# Altium PCB AD637均方根值检测_print.PcbDoc
Units mil, origin at the board's own origin, x right, y up, seen from the top; angles counter-clockwise.
Board outline 6000 x 4000 mil, 2 copper layers (Top Layer, Bottom Layer); 108 components, 0 nets, 360 pads, 8 vias.
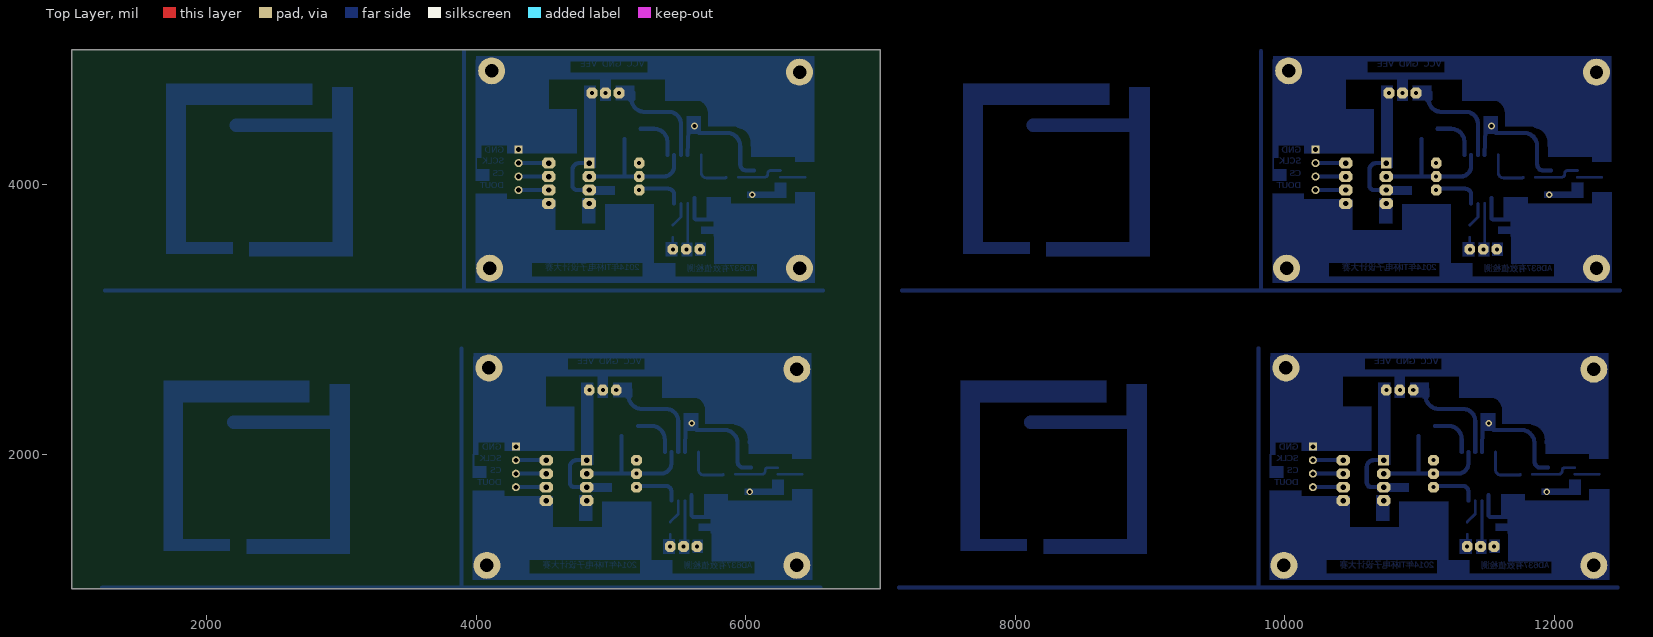
[diagram p0: Top Layer view]
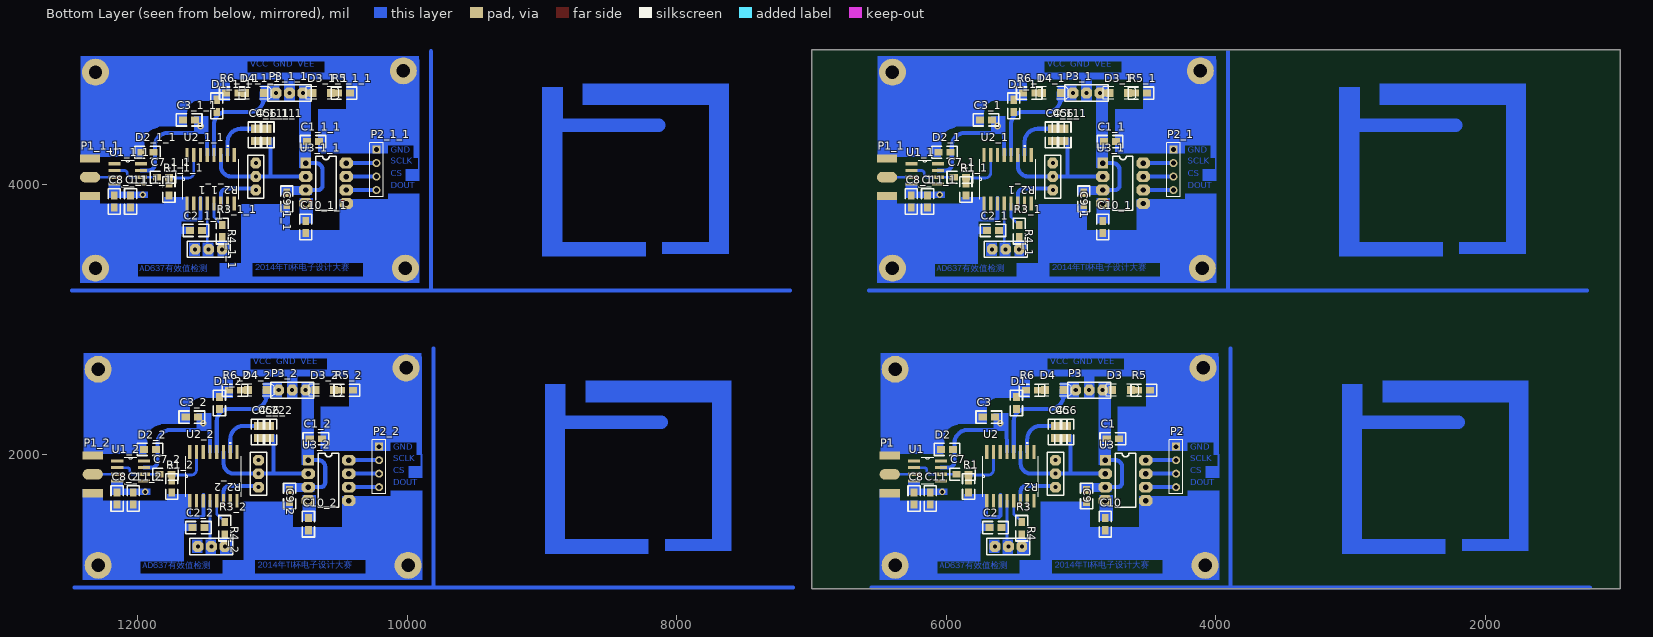
[diagram p1: Bottom Layer view, seen from below]

## Layer stack, top to bottom
Top Layer: signal copper 1.4
Dielectric: dielectric 12.6, FR-4, Dk 4.8
Bottom Layer: signal copper 1.4

## Board outline
1000,1000 7000,1000 7000,5000 1000,5000

## Design rules (kind name [scope] priority, off if disabled: settings)
Clearance [All] p1: gap=10
PolygonConnect [All] p1: connectstyle=Relief reliefconductorwidth=10 reliefentries=4 polygonreliefangle="90 Angle"
RoutingVias [All] p1: holewidth=28 width=50 viastyle="Through Hole" minholewidth=28 minwidth=50 maxholewidth=28 maxwidth=50
SilkscreenOverComponentPads [All] p1: minsilkscreentomaskgap=10
SolderMaskExpansion [All] p1: expansion=4
TestPointUsage [All] p1: valid=0 allowmultiple=FALSE
Testpoint [All] p1: side=15 testpointundercomponent=TRUE minsize=40 maxsize=100 preferedsize=60 minholesize=0 maxholesize=40 preferedholesize=32 testpointgrid=1 style=1023 order=0123456789
Width [All] p1: maxlimit=10 minlimit=10 preferedwidth=10
23 further rules are at their usual default settings.

## Components (designator, comment, footprint, x,y, rotation, side; value= is the part's Value field where it differs from the comment)
C1 "Cap" 0805 4720,2115 r0 bottom
C1_1 "Cap" 0805 4740,4320 r0 bottom (schematic designator C1)
C1_1_1 "Cap" 0805 10655,4320 r0 bottom (schematic designator C1)
C1_2 "Cap" 0805 10635,2115 r0 bottom (schematic designator C1)
C2 "Cap" 0805 5680,1455 r180 bottom
C2_1 "Cap" 0805 5700,3660 r180 bottom (schematic designator C2)
C2_1_1 "Cap" 0805 11615,3660 r180 bottom (schematic designator C2)
C2_2 "Cap" 0805 11595,1455 r180 bottom (schematic designator C2)
C3 "Cap" 0805 5640,2275 r0 bottom
C3_1 "Cap" 0805 5660,4480 r0 bottom (schematic designator C3)
C3_1_1 "Cap" 0805 11575,4480 r0 bottom (schematic designator C3)
C3_2 "Cap" 0805 11555,2275 r0 bottom (schematic designator C3)
C4 "Cap" 0805 5200,2120 r90 bottom
C4_1 "Cap" 0805 5220,4325 r90 bottom (schematic designator C4)
C4_1_1 "Cap" 0805 11135,4325 r90 bottom (schematic designator C4)
C4_2 "Cap" 0805 11115,2120 r90 bottom (schematic designator C4)
C5 "Cap" 0805 5150,2120 r90 bottom
C5_1 "Cap" 0805 5170,4325 r90 bottom (schematic designator C5)
C5_1_1 "Cap" 0805 11085,4325 r90 bottom (schematic designator C5)
C5_2 "Cap" 0805 11065,2120 r90 bottom (schematic designator C5)
C6 "Cap" 0805 5100,2120 r90 bottom
C6_1 "Cap" 0805 5120,4325 r90 bottom (schematic designator C6)
C6_1_1 "Cap" 0805 11035,4325 r90 bottom (schematic designator C6)
C6_2 "Cap" 0805 11015,2120 r90 bottom (schematic designator C6)
C7 "Cap" 0805 5925,1850 r180 bottom
C7_1 "Cap" 0805 5945,4055 r180 bottom (schematic designator C7)
C7_1_1 "Cap" 0805 11860,4055 r180 bottom (schematic designator C7)
C7_2 "Cap" 0805 11840,1850 r180 bottom (schematic designator C7)
C8 "Cap" 0805 6240,1715 r270 bottom
C8_1 "Cap" 0805 6260,3920 r270 bottom (schematic designator C8)
C8_1_1 "Cap" 0805 12175,3920 r270 bottom (schematic designator C8)
C8_2 "Cap" 0805 12155,1715 r270 bottom (schematic designator C8)
C9 "Cap" 0805 4960,1735 r270 bottom
C9_1 "Cap" 0805 4980,3940 r270 bottom (schematic designator C9)
C9_1_1 "Cap" 0805 10895,3940 r270 bottom (schematic designator C9)
C9_2 "Cap" 0805 10875,1735 r270 bottom (schematic designator C9)
C10 "Cap" 0805 4820,1435 r90 bottom
C10_1 "Cap" 0805 4840,3640 r90 bottom (schematic designator C10)
C10_1_1 "Cap" 0805 10755,3640 r90 bottom (schematic designator C10)
C10_2 "Cap" 0805 10735,1435 r90 bottom (schematic designator C10)
C11 "Cap" 0805 6120,1715 r270 bottom (schematic designator C8)
C11_1 "Cap" 0805 6140,3920 r270 bottom (schematic designator C8)
C11_1_1 "Cap" 0805 12055,3920 r270 bottom (schematic designator C8)
C11_2 "Cap" 0805 12035,1715 r270 bottom (schematic designator C8)
D1 "Diode 1N4007" 0805 5480,2335 r90 bottom
D1_1 "Diode 1N4007" 0805 5500,4540 r90 bottom (schematic designator D1)
D1_1_1 "Diode 1N4007" 0805 11415,4540 r90 bottom (schematic designator D1)
D1_2 "Diode 1N4007" 0805 11395,2335 r90 bottom (schematic designator D1)
D2 "Diode 1N4007" 0805 6040,2035 r180 bottom
D2_1 "Diode 1N4007" 0805 6060,4240 r180 bottom (schematic designator D2)
D2_1_1 "Diode 1N4007" 0805 11975,4240 r180 bottom (schematic designator D2)
D2_2 "Diode 1N4007" 0805 11955,2035 r180 bottom (schematic designator D2)
D3 "LED2" 3.2X1.6X1.1 4700,2475 r180 bottom
D3_1 "LED2" 3.2X1.6X1.1 4720,4680 r180 bottom (schematic designator D3)
D3_1_1 "LED2" 3.2X1.6X1.1 10635,4680 r180 bottom (schematic designator D3)
D3_2 "LED2" 3.2X1.6X1.1 10615,2475 r180 bottom (schematic designator D3)
D4 "LED2" 3.2X1.6X1.1 5200,2475 r180 bottom
D4_1 "LED2" 3.2X1.6X1.1 5220,4680 r180 bottom (schematic designator D4)
D4_1_1 "LED2" 3.2X1.6X1.1 11135,4680 r180 bottom (schematic designator D4)
D4_2 "LED2" 3.2X1.6X1.1 11115,2475 r180 bottom (schematic designator D4)
P1 "SMA" SMA 6500,2020 r180 bottom
P1_1 "SMA" SMA 6520,4225 r180 bottom (schematic designator P1)
P1_1_1 "SMA" SMA 12435,4225 r180 bottom (schematic designator P1)
P1_2 "SMA" SMA 12415,2020 r180 bottom (schematic designator P1)
P2 "Header 4" HDR1X4 4295,2055 r270 bottom
P2_1 "Header 4" HDR1X4 4315,4260 r270 bottom (schematic designator P2)
P2_1_1 "Header 4" HDR1X4 10230,4260 r270 bottom (schematic designator P2)
P2_2 "Header 4" HDR1X4 10210,2055 r270 bottom (schematic designator P2)
P3 "Header 3" 3P排针 5040,2475 r180 bottom
P3_1 "Header 3" 3P排针 5060,4680 r180 bottom (schematic designator P3)
P3_1_1 "Header 3" 3P排针 10975,4680 r180 bottom (schematic designator P3)
P3_2 "Header 3" 3P排针 10955,2475 r180 bottom (schematic designator P3)
R1 "Res2" 0805 5835,1715 r90 bottom
R1_1 "Res2" 0805 5855,3920 r90 bottom (schematic designator R1)
R1_1_1 "Res2" 0805 11770,3920 r90 bottom (schematic designator R1)
R1_2 "Res2" 0805 11750,1715 r90 bottom (schematic designator R1)
R2 "1K" 3P排针 5190,1955 r270 bottom
R2_1 "1K" 3P排针 5210,4160 r270 bottom (schematic designator R2)
R2_1_1 "1K" 3P排针 11125,4160 r270 bottom (schematic designator R2)
R2_2 "1K" 3P排针 11105,1955 r270 bottom (schematic designator R2)
R3 "Res2" 0805 5440,1495 r270 bottom
R3_1 "Res2" 0805 5460,3700 r270 bottom (schematic designator R3)
R3_1_1 "Res2" 0805 11375,3700 r270 bottom (schematic designator R3)
R3_2 "Res2" 0805 11355,1495 r270 bottom (schematic designator R3)
R4 "50K" 3P排针 5640,1315 r180 bottom
R4_1 "50K" 3P排针 5660,3520 r180 bottom (schematic designator R4)
R4_1_1 "50K" 3P排针 11575,3520 r180 bottom (schematic designator R4)
R4_2 "50K" 3P排针 11555,1315 r180 bottom (schematic designator R4)
R5 "Res2" 0805 4580,2475 r180 bottom
R5_1 "Res2" 0805 4600,4680 r180 bottom (schematic designator R5)
R5_1_1 "Res2" 0805 10515,4680 r180 bottom (schematic designator R5)
R5_2 "Res2" 0805 10495,2475 r180 bottom (schematic designator R5)
R6 "Res2" 0805 5320,2475 r0 bottom
R6_1 "Res2" 0805 5340,4680 r0 bottom (schematic designator R6)
R6_1_1 "Res2" 0805 11255,4680 r0 bottom (schematic designator R6)
R6_2 "Res2" 0805 11235,2475 r0 bottom (schematic designator R6)
U1 "OPA656" THS3001_SOIC 6140,1875 r180 bottom
U1_1 "OPA656" THS3001_SOIC 6160,4080 r180 bottom (schematic designator U1)
U1_1_1 "OPA656" THS3001_SOIC 12075,4080 r180 bottom (schematic designator U1)
U1_2 "OPA656" THS3001_SOIC 12055,1875 r180 bottom (schematic designator U1)
U2 "AD637" AD637_SOIC 5520,1835 r90 bottom
U2_1 "AD637" AD637_SOIC 5540,4040 r90 bottom (schematic designator U2)
U2_1_1 "AD637" AD637_SOIC 11455,4040 r90 bottom (schematic designator U2)
U2_2 "AD637" AD637_SOIC 11435,1835 r90 bottom (schematic designator U2)
U3 "MAX187" DIP8 4820,1955 r180 bottom
U3_1 "MAX187" DIP8 4840,4160 r180 bottom (schematic designator U3)
U3_1_1 "MAX187" DIP8 10755,4160 r180 bottom (schematic designator U3)
U3_2 "MAX187" DIP8 10735,1955 r180 bottom (schematic designator U3)

## Footprints (in the part's own frame and the unit in brackets; to place one, negate y for a bottom-side part, rotate by r counter-clockwise, add the part's x,y. Pads: shape width x height; smd on the part's side, far side on the other; paste and mask are expansions set on the pad)
3.2X1.6X1.1 [mm] "SMT LED; 2 Flat Leads"
  rect 1.5x1.5 smd: 1(-1.75,0) 2(1.75,0)
  silkscreen extent -2.9,-1.15 3.2,1.15
3P排针 [mil]
  oct 80x80 hole 30: 1(0,0) 2(100,0) 3(200,0)
  silkscreen extent -60,-60 260,60
0805 [mil]
  rect 60x50 smd: 1(0,0) 2(90,0)
  silkscreen extent -50,-45 140,45
AD637_SOIC [mil]
  rect 102.5x24 smd: 1(-180.25,180) 2(-180.25,130) 3(-180.25,80) 4(-180.25,30) 5(-180.25,-20) 6(-180.25,-70) 7(-180.25,-120) 8(-180.25,-170) 9(180.25,-170) 10(180.25,-120) 11(180.25,-70) 12(180.25,-20) 13(180.25,30) 14(180.25,80) 15(180.25,130) 16(180.25,180)
  silkscreen extent -150,-202 252,212
DIP8 [mil]
  rect 80x80 hole 40: 1(0,0)
  oct 100x80 hole 40: 2(0,-100) 3(0,-200) 4(0,-300) 5(300,-300) 6(300,-200) 7(300,-100) 8(300,0)
  silkscreen extent 75,-350 225,50
HDR1X4 [mm] "Connector; Header; 4 Position"
  rect 1.5x1.5 hole 0.9: 1(0,0)
  round 1.5 hole 0.9: 2(2.54,0) 3(5.08,0) 4(7.62,0)
  silkscreen extent -1.27,-1.27 8.89,1.27
SMA [mil]
  oval 150x80 smd: 1(80,-170)
  rect 150x60 smd: 2(80,-310) 2(80,-30)
THS3001_SOIC [mil]
  rect 90x24 smd: 1(-99,75) 2(-99,25) 3(-99,-25) 4(-99,-75) 5(99,-75) 6(99,-25) 7(99,25) 8(99,75)
  silkscreen extent -48,-98 48,98

## Part data
C1 C1_1 C1_1_1 C1_2 C2 C2_1 C2_1_1 C2_2 C3 C3_1 C3_1_1 C3_2 C4 C4_1 C4_1_1 C4_2 C5 C5_1 C5_1_1 C5_2 C6 C6_1 C6_1_1 C6_2 C7 C7_1 C7_1_1 C7_2 C8 C8_1 C8_1_1 C8_2 C9 C9_1 C9_1_1 C9_2 C10 C10_1 C10_1_1 C10_2 C11 C11_1 C11_1_1 C11_2: "Capacitor"
D1 D1_1 D1_1_1 D1_2 D2 D2_1 D2_1_1 D2_2: "1 Amp General Purpose Rectifier"
D3 D3_1 D3_1_1 D3_2 D4 D4_1 D4_1_1 D4_2: "Typical RED, GREEN, YELLOW, AMBER GaAs LED"
P2 P2_1 P2_1_1 P2_2: "Header, 4-Pin"
P3 P3_1 P3_1_1 P3_2: "Header, 3-Pin"
R1 R1_1 R1_1_1 R1_2 R3 R3_1 R3_1_1 R3_2 R5 R5_1 R5_1_1 R5_2 R6 R6_1 R6_1_1 R6_2: "Resistor"
R2 R2_1 R2_1_1 R2_2 R4 R4_1 R4_1_1 R4_2: library part 电位器_3296W
U3 U3_1 U3_1_1 U3_2: "+5V、低功耗、12位串行ADC"

## Free pads (board coordinates)
  round 200 hole 100: 0(4080,1175) 0(4095,2640) 0(4100,3380) 0(4115,4845) 0(6380,1175) 0(6400,3380) 0(9995,1175) 0(10010,2640) 0(10015,3380) 0(10030,4845) 0(12295,1175) 0(12315,3380) 1(6380,2630) 1(6400,4835) 1(12295,2630) 1(12315,4835)

## Via types
v1: diameter 50, hole 28, Top Layer to Bottom Layer, 8 vias

## Nets (pads, with @x,y where several pads share a name; then routed paths per layer and width w, separated by ;. In a path a pad name is that pad's centre, name@x,y a point inside that pad or via, vN(x,y) a via of type N, cw(c..) or ccw(c..) an arc to the next point about the centre after c; other vN are vias at no path point)
pads on no net: C1.1 C1.2 C1_1.1 C1_1.2 C1_1_1.1 C1_1_1.2 C1_2.1 C1_2.2 C2.1 C2.2 C2_1.1 C2_1.2 C2_1_1.1 C2_1_1.2 C2_2.1 C2_2.2 C3.1 C3.2 C3_1.1 C3_1.2 C3_1_1.1 C3_1_1.2 C3_2.1 C3_2.2 C4.1 C4.2 C4_1.1 C4_1.2 C4_1_1.1 C4_1_1.2 C4_2.1 C4_2.2 C5.1 C5.2 C5_1.1 C5_1.2 C5_1_1.1 C5_1_1.2 C5_2.1 C5_2.2 C6.1 C6.2 C6_1.1 C6_1.2 C6_1_1.1 C6_1_1.2 C6_2.1 C6_2.2 C7.1 C7.2 C7_1.1 C7_1.2 C7_1_1.1 C7_1_1.2 C7_2.1 C7_2.2 C8.1 C8.2 C8_1.1 C8_1.2 C8_1_1.1 C8_1_1.2 C8_2.1 C8_2.2 C9.1 C9.2 C9_1.1 C9_1.2 C9_1_1.1 C9_1_1.2 C9_2.1 C9_2.2 C10.1 C10.2 C10_1.1 C10_1.2 C10_1_1.1 C10_1_1.2 C10_2.1 C10_2.2 C11.1 C11.2 C11_1.1 C11_1.2 C11_1_1.1 C11_1_1.2 C11_2.1 C11_2.2 D1.1 D1.2 D1_1.1 D1_1.2 D1_1_1.1 D1_1_1.2 D1_2.1 D1_2.2 D2.1 D2.2 D2_1.1 D2_1.2 D2_1_1.1 D2_1_1.2 D2_2.1 D2_2.2 D3.1 D3.2 D3_1.1 D3_1.2 D3_1_1.1 D3_1_1.2 D3_2.1 D3_2.2 D4.1 D4.2 D4_1.1 D4_1.2 D4_1_1.1 D4_1_1.2 D4_2.1 D4_2.2 P1.1 P1.2 P1_1.1 P1_1.2 P1_1_1.1 P1_1_1.2 P1_2.1 P1_2.2 P2.1 P2.2 P2.3 P2.4 P2_1.1 P2_1.2 P2_1.3 P2_1.4 P2_1_1.1 P2_1_1.2 P2_1_1.3 P2_1_1.4 P2_2.1 P2_2.2 P2_2.3 P2_2.4 P3.1 P3.2 P3.3 P3_1.1 P3_1.2 P3_1.3 P3_1_1.1 P3_1_1.2 P3_1_1.3 P3_2.1 P3_2.2 P3_2.3 R1.1 R1.2 R1_1.1 R1_1.2 R1_1_1.1 R1_1_1.2 R1_2.1 R1_2.2 R2.1 R2.2 R2.3 R2_1.1 R2_1.2 R2_1.3 R2_1_1.1 R2_1_1.2 R2_1_1.3 R2_2.1 R2_2.2 R2_2.3 R3.1 R3.2 R3_1.1 R3_1.2 R3_1_1.1 R3_1_1.2 R3_2.1 R3_2.2 R4.1 R4.2 R4.3 R4_1.1 R4_1.2 R4_1.3 R4_1_1.1 R4_1_1.2 R4_1_1.3 R4_2.1 R4_2.2 R4_2.3 R5.1 R5.2 R5_1.1 R5_1.2 R5_1_1.1 R5_1_1.2 R5_2.1 R5_2.2 R6.1 R6.2 R6_1.1 R6_1.2 R6_1_1.1 R6_1_1.2 R6_2.1 R6_2.2 U1.1 U1.2 U1.3 U1.4 U1.5 U1.6 U1.7 U1.8 U1_1.1 U1_1.2 U1_1.3 U1_1.4 U1_1.5 U1_1.6 U1_1.7 U1_1.8 U1_1_1.1 U1_1_1.2 U1_1_1.3 U1_1_1.4 U1_1_1.5 U1_1_1.6 U1_1_1.7 U1_1_1.8 U1_2.1 U1_2.2 U1_2.3 U1_2.4 U1_2.5 U1_2.6 U1_2.7 U1_2.8 U2.1 U2.2 U2.3 U2.4 U2.5 U2.6 U2.7 U2.8 U2.9 U2.10 U2.11 U2.12 U2.13 U2.14 U2.15 U2.16 U2_1.1 U2_1.2 U2_1.3 U2_1.4 U2_1.5 U2_1.6 U2_1.7 U2_1.8 U2_1.9 U2_1.10 U2_1.11 U2_1.12 U2_1.13 U2_1.14 U2_1.15 U2_1.16 U2_1_1.1 U2_1_1.2 U2_1_1.3 U2_1_1.4 U2_1_1.5 U2_1_1.6 U2_1_1.7 U2_1_1.8 U2_1_1.9 U2_1_1.10 U2_1_1.11 U2_1_1.12 U2_1_1.13 U2_1_1.14 U2_1_1.15 U2_1_1.16 U2_2.1 U2_2.2 U2_2.3 U2_2.4 U2_2.5 U2_2.6 U2_2.7 U2_2.8 U2_2.9 U2_2.10 U2_2.11 U2_2.12 U2_2.13 U2_2.14 U2_2.15 U2_2.16 U3.1 U3.2 U3.3 U3.4 U3.5 U3.6 U3.7 U3.8 U3_1.1 U3_1.2 U3_1.3 U3_1.4 U3_1.5 U3_1.6 U3_1.7 U3_1.8 U3_1_1.1 U3_1_1.2 U3_1_1.3 U3_1_1.4 U3_1_1.5 U3_1_1.6 U3_1_1.7 U3_1_1.8 U3_2.1 U3_2.2 U3_2.3 U3_2.4 U3_2.5 U3_2.6 U3_2.7 U3_2.8
copper on no net: | length 66295.9
  Bottom Layer w20: 5090,1855 ccw(c5090,1860) 5095,1860 ; 5110,4060 ccw(c5110,4065) 5115,4065 ; 5370,1855 ccw(c5370,1935) 5450,1935 ; 5390,4060 ccw(c5390,4140) 5470,4140 ; 5440,1315 5440,1405 ; 5440,1495 5500,1555 5500,1654.75 ; 5460,3520 5460,3610 ; 5460,3700 5520,3760 5520,3859.75 ; 5550,1325 5550,1435 5550,1654.75 ; 5570,3530 5570,3640 5570,3859.75 ; 5600,1545 5610,1535 ; 5620,3750 5630,3740 ; 5650,2015.25 5650,1885 ccw(c5690,1885) 5690,1845 5830,1845 ; 5670,4220.25 5670,4090 ccw(c5710,4090) 5710,4050 5850,4050 ; 5925,1850 6041,1850 6120,1850 ccw(c6120,1875) 6145,1875 6145,1880 cw(c6165,1880) 6165,1900 6239,1900 ; 5945,4055 6061,4055 6140,4055 ccw(c6140,4080) 6165,4080 6165,4085 cw(c6185,4085) 6185,4105 6259,4105 ; 6239,1850 6420,1850 ; 6259,4055 6440,4055 ; 11005,1855 ccw(c11005,1860) 11010,1860 ; 11025,4060 ccw(c11025,4065) 11030,4065 ; 11285,1855 ccw(c11285,1935) 11365,1935 ; 11305,4060 ccw(c11305,4140) 11385,4140 ; 11355,1315 11355,1405 ; 11355,1495 11415,1555 11415,1654.75 ; 11375,3520 11375,3610 ; 11375,3700 11435,3760 11435,3859.75 ; 11465,1325 11465,1435 11465,1654.75 ; 11485,3530 11485,3640 11485,3859.75 ; 11515,1545 11525,1535 ; 11535,3750 11545,3740 ; 11565,2015.25 11565,1885 ccw(c11605,1885) 11605,1845 11745,1845 ; 11585,4220.25 11585,4090 ccw(c11625,4090) 11625,4050 11765,4050 ; 11840,1850 11956,1850 12035,1850 ccw(c12035,1875) 12060,1875 12060,1880 cw(c12080,1880) 12080,1900 12154,1900 ; 11860,4055 11976,4055 12055,4055 ccw(c12055,4080) 12080,4080 12080,4085 cw(c12100,4085) 12100,4105 12174,4105 ; 12154,1850 12335,1850 ; 12174,4055 12355,4055 ; 5830,1845 ccw(c5830,1850) 5835,1850 cw(c5830,1850) 5830,1845 ; 5850,4050 ccw(c5850,4055) 5855,4055 cw(c5850,4055) 5850,4050 ; 11745,1845 ccw(c11745,1850) 11750,1850 cw(c11745,1850) 11745,1845 ; 11765,4050 ccw(c11765,4055) 11770,4055 cw(c11765,4055) 11765,4050 ; 5190,1755 cw(c5214.14,1730.86) 5214.14,1765 ccw(c5214.14,1730.86) 5190,1755 ; 5210,3960 cw(c5234.14,3935.86) 5234.14,3970 ccw(c5234.14,3935.86) 5210,3960 ; 11105,1755 cw(c11129.14,1730.86) 11129.14,1765 ccw(c11129.14,1730.86) 11105,1755 ; 11125,3960 cw(c11149.14,3935.86) 11149.14,3970 ccw(c11149.14,3935.86) 11125,3960
  Bottom Layer w30: 1225,1010 3890,1010 ; 1245,3215 3910,3215 ; 4295,1755 4520,1755 ; 4295,1855 4520,1855 ; 4295,1955 4520,1955 ; 4315,3960 4540,3960 ; 4315,4060 4540,4060 ; 4315,4160 4540,4160 ; 4820,1755 4730,1755 cw(c4730,1790) 4695,1790 4695,1905 cw(c4745,1905) 4745,1955 4820,1955 ; 4820,1855 5190,1855 5370,1855 ccw(c5370,1935) 5450,1935 5450,2015.25 ; 4840,3960 4750,3960 cw(c4750,3995) 4715,3995 4715,4110 cw(c4765,4110) 4765,4160 4840,4160 ; 4840,4060 5210,4060 5390,4060 ccw(c5390,4140) 5470,4140 5470,4220.25 ; 5080,1860 5080,2135 ; 5100,4065 5100,4340 ; 5131.1,2435 ccw(c5231.1,2435) 5231.1,2335 5410,2335 ; 5131.1,2450 5131.1,2475 ; 5151.1,4640 ccw(c5251.1,4640) 5251.1,4540 5430,4540 ; 5151.1,4655 5151.1,4680 ; 5200,2210 5300,2210 cw(c5300,2110) 5400,2110 5400,2015.25 ; 5214.14,1765 5405,1765 cw(c5405,1720) 5450,1720 5450,1654.75 ; 5220,4415 5320,4415 cw(c5320,4315) 5420,4315 5420,4220.25 ; 5234.14,3970 5425,3970 cw(c5425,3925) 5470,3925 5470,3859.75 ; 5500,2015.25 5500,2245 ; 5520,4220.25 5520,4450 ; 5550,2015.25 5555,2210 ; 5570,4220.25 5575,4415 ; 5600,1545 5600,1695 ; 5610,1535 5745,1535 ; 5620,3750 5620,3900 ; 5630,3740 5765,3740 ; 5635,2180 5840,2180 cw(c5840,2080) 5940,2080 5940,1945 ccw(c5985,1945) 5985,1900 6041,1900 ; 5655,4385 5860,4385 cw(c5860,4285) 5960,4285 5960,4150 ccw(c6005,4150) 6005,4105 6061,4105 ; 6555,1010 3890,1010 ; 6575,3215 3910,3215 ; 7140,1010 9805,1010 ; 7160,3215 9825,3215 ; 10210,1755 10435,1755 ; 10210,1855 10435,1855 ; 10210,1955 10435,1955 ; 10230,3960 10455,3960 ; 10230,4060 10455,4060 ; 10230,4160 10455,4160 ; 10735,1755 10645,1755 cw(c10645,1790) 10610,1790 10610,1905 cw(c10660,1905) 10660,1955 10735,1955 ; 10735,1855 11105,1855 11285,1855 ccw(c11285,1935) 11365,1935 11365,2015.25 ; 10755,3960 10665,3960 cw(c10665,3995) 10630,3995 10630,4110 cw(c10680,4110) 10680,4160 10755,4160 ; 10755,4060 11125,4060 11305,4060 ccw(c11305,4140) 11385,4140 11385,4220.25 ; 10995,1860 10995,2135 ; 11015,4065 11015,4340 ; 11046.1,2435 ccw(c11146.1,2435) 11146.1,2335 11325,2335 ; 11046.1,2450 11046.1,2475 ; 11066.1,4640 ccw(c11166.1,4640) 11166.1,4540 11345,4540 ; 11066.1,4655 11066.1,4680 ; 11115,2210 11215,2210 cw(c11215,2110) 11315,2110 11315,2015.25 ; 11129.14,1765 11320,1765 cw(c11320,1720) 11365,1720 11365,1654.75 ; 11135,4415 11235,4415 cw(c11235,4315) 11335,4315 11335,4220.25 ; 11149.14,3970 11340,3970 cw(c11340,3925) 11385,3925 11385,3859.75 ; 11415,2015.25 11415,2245 ; 11435,4220.25 11435,4450 ; 11465,2015.25 11470,2210 ; 11485,4220.25 11490,4415 ; 11515,1545 11515,1695 ; 11525,1535 11660,1535 ; 11535,3750 11535,3900 ; 11545,3740 11680,3740 ; 11550,2180 11755,2180 cw(c11755,2080) 11855,2080 11855,1945 ccw(c11900,1945) 11900,1900 11956,1900 ; 11570,4385 11775,4385 cw(c11775,4285) 11875,4285 11875,4150 ccw(c11920,4150) 11920,4105 11976,4105 ; 12470,1010 9805,1010 ; 12490,3215 9825,3215 ; 3890,1010 3890,2785 3890,1010 ; 3910,3215 3910,4990 3910,3215 ; 5410,2335 cw(c5410,2245) 5500,2245 ; 5410,2335 cw(c5410,2245) 5500,2245 ; 5430,4540 cw(c5430,4450) 5520,4450 ; 5430,4540 cw(c5430,4450) 5520,4450 ; 9805,1010 9805,2785 9805,1010 ; 9825,3215 9825,4990 9825,3215 ; 11325,2335 cw(c11325,2245) 11415,2245 ; 11325,2335 cw(c11325,2245) 11415,2245 ; 11345,4540 cw(c11345,4450) 11435,4450 ; 11345,4540 cw(c11345,4450) 11435,4450
  Bottom Layer w60: 5131.1,2435 5131.1,2475 ; 5151.1,4640 5151.1,4680 ; 5615,2455 cw(c5595,2320) 5730,2300 ; 5635,4660 cw(c5615,4525) 5750,4505 ; 5930,2245 cw(c5910,2110) 6045,2090 ; 5950,4450 cw(c5930,4315) 6065,4295 ; 11046.1,2435 11046.1,2475 ; 11066.1,4640 11066.1,4680 ; 11530,2455 cw(c11510,2320) 11645,2300 ; 11550,4660 cw(c11530,4525) 11665,4505 ; 11845,2245 cw(c11825,2110) 11960,2090 ; 11865,4450 cw(c11845,4315) 11980,4295
  Bottom Layer w100: 2200,2235 2970,2235 ; 2220,4440 2990,4440 ; 8115,2235 8885,2235 ; 8135,4440 8905,4440
  other v1: 6030,1720 11945,1720 5600,2230 11515,2230 6050,3925 11965,3925 5620,4435 11535,4435

## Other copper
Bottom Layer:
  rectangle: 7740,1280 8090,1370
  rectangle: 8210,1260 8830,1370
  rectangle: 8830,1260 8980,2190
  rectangle: 7595,1280 7740,2385
  rectangle: 7595,2385 8680,2545
  rectangle: 8825,2190 8980,2520
  region: 9933.56,2024.14 9890,2024.14 9890,1994.14 9933.56,1994.14
  region: 9901.31,2002.17 9889.2,2002.17 9889.2,1912.17 9901.31,1912.17
  region: 9933.56,2117.17 9890,2117.17 9890,2024.14 9933.56,2024.14
  region: 11675,1485 11565,1485 11565,1430 11675,1430
  region: 10125,2117.17 9933.56,2117.17 9933.56,2087.17 10125,2087.17
  region: 11600,1365 11520,1365 11520,1265 11600,1265
  region: 11565,2305 11455,2305 11455,2170 11565,2170
  region: 11390,1370 11300,1370 11300,1260 11390,1260
  region: 11350,2722.17 11165.08,2722.17 11165.08,2575 11350,2575
  region: 11070,2530 10930,2530 10930,2420 11070,2420
  region: 10895,2595 10815,2595 10815,2415 10895,2415
  region: 10780,1695 10680,1695 10680,1505 10780,1505
  region: 9992.84,1912.17 9889.2,1912.17 9889.2,1822.17 9992.84,1822.17
  region: 10125,2355 9890,2355 9890,2117.17 10125,2117.17
  region: 12200,1810 12110,1810 12110,1695 12200,1695
  region: 11373.46,1215 11129.92,1215 11129.92,1107.74 11373.46,1107.74
  region: 10785,2530 10695,2530 10695,1920 10785,1920
  region: 10125,1729.14 9889.2,1729.14 9889.2,1215 10125,1215
  region: 11500,1365 11420,1365 11420,1260 11500,1260
  region: 11980,1410 11660,1410 11660,1205 11980,1205
  region: 12110,1745 11905,1745 11905,1695 12110,1695
  region: 12410,1740 12260,1740 12260,1655 12410,1655
  region: 11785,1705 11605,1705 11605,1545 11785,1545
  region: 12260,2450 11295,2450 11295,2415 12260,2415
  region: 12405,2725 11295,2725 11295,2450 12405,2450
  region: 10595.79,2725 10435,2725 10435,2629.14 10595.79,2629.14
  region: 11775,1555 11655,1555 11655,1410 11775,1410
  region: 12410,1410 11980,1410 11980,1065 12410,1065
  region: 12405,2450 12260,2450 12260,1965 12405,1965
  region: 12265,2420 11935,2420 11935,2000 12265,2000
  region: 11935,2420 11615,2420 11615,2225 11935,2225
  region: 11215,1460 10485,1460 10485,1215 11215,1215
  region: 10925,1785 10690,1785 10690,1720 10925,1720
  region: 10645,2355 10125,2355 10125,2025 10645,2025
  region: 12410,1655 11775,1655 11775,1410 12410,1410
  region: 11215,1650 10850,1650 10850,1390 11215,1390
  region: 10485,1690 10125,1690 10125,1215 10485,1215
  region: 11325,2740 10575,2740 10575,2710 11325,2710
  region: 12405,2750 9895,2750 9895,2725 12405,2725
  region: 11980,1112.5 9889.2,1112.5 9889.2,1065 11980,1065
  region: 11350,2629.14 10435,2629.14 10435,2575 11350,2575
  region: 10310,1215 9889.2,1215 9889.2,1112.5 10310,1112.5
  region: 10435,2725 9890,2725 9890,2355 10435,2355
  region: 10455,4930 9910,4930 9910,4560 10455,4560
  region: 10330,3420 9909.2,3420 9909.2,3317.5 10330,3317.5
  region: 11370,4834.14 10455,4834.14 10455,4780 11370,4780
  region: 12000,3317.5 9909.2,3317.5 9909.2,3270 12000,3270
  region: 12425,4955 9915,4955 9915,4930 12425,4930
  region: 11345,4945 10595,4945 10595,4915 11345,4915
  region: 10505,3895 10145,3895 10145,3420 10505,3420
  region: 11235,3855 10870,3855 10870,3595 11235,3595
  region: 12430,3860 11795,3860 11795,3615 12430,3615
  region: 10665,4560 10145,4560 10145,4230 10665,4230
  region: 10945,3990 10710,3990 10710,3925 10945,3925
  region: 11235,3665 10505,3665 10505,3420 11235,3420
  region: 11955,4625 11635,4625 11635,4430 11955,4430
  region: 12285,4625 11955,4625 11955,4205 12285,4205
  region: 12425,4655 12280,4655 12280,4170 12425,4170
  region: 12430,3615 12000,3615 12000,3270 12430,3270
  region: 11795,3760 11675,3760 11675,3615 11795,3615
  region: 10615.79,4930 10455,4930 10455,4834.14 10615.79,4834.14
  region: 12425,4930 11315,4930 11315,4655 12425,4655
  region: 12280,4655 11315,4655 11315,4620 12280,4620
  region: 11805,3910 11625,3910 11625,3750 11805,3750
  region: 12430,3945 12280,3945 12280,3860 12430,3860
  region: 12130,3950 11925,3950 11925,3900 12130,3900
  region: 12000,3615 11680,3615 11680,3410 12000,3410
  region: 11520,3570 11440,3570 11440,3465 11520,3465
  region: 10145,3934.14 9909.2,3934.14 9909.2,3420 10145,3420
  region: 10805,4735 10715,4735 10715,4125 10805,4125
  region: 11393.46,3420 11149.92,3420 11149.92,3312.74 11393.46,3312.74
  region: 12220,4015 12130,4015 12130,3900 12220,3900
  region: 10145,4560 9910,4560 9910,4322.17 10145,4322.17
  region: 10012.84,4117.17 9909.2,4117.17 9909.2,4027.17 10012.84,4027.17
  region: 10800,3900 10700,3900 10700,3710 10800,3710
  region: 10915,4800 10835,4800 10835,4620 10915,4620
  region: 11090,4735 10950,4735 10950,4625 11090,4625
  region: 11370,4927.17 11185.08,4927.17 11185.08,4780 11370,4780
  region: 11410,3575 11320,3575 11320,3465 11410,3465
  region: 11585,4510 11475,4510 11475,4375 11585,4375
  region: 11620,3570 11540,3570 11540,3470 11620,3470
  region: 10145,4322.17 9953.56,4322.17 9953.56,4292.17 10145,4292.17
  region: 11695,3690 11585,3690 11585,3635 11695,3635
  region: 9953.56,4322.17 9910,4322.17 9910,4229.14 9953.56,4229.14
  region: 9921.31,4207.17 9909.2,4207.17 9909.2,4117.17 9921.31,4117.17
  region: 9953.56,4229.14 9910,4229.14 9910,4199.14 9953.56,4199.14
  rectangle: 8845,4395 9000,4725
  rectangle: 7615,4590 8700,4750
  rectangle: 7615,3485 7760,4590
  rectangle: 8850,3465 9000,4395
  rectangle: 8230,3465 8850,3575
  rectangle: 7760,3485 8110,3575
  rectangle: 1845,3485 2195,3575
  rectangle: 2315,3465 2935,3575
  rectangle: 2935,3465 3085,4395
  rectangle: 1700,3485 1845,4590
  rectangle: 1700,4590 2785,4750
  rectangle: 2930,4395 3085,4725
  region: 4038.56,4229.14 3995,4229.14 3995,4199.14 4038.56,4199.14
  region: 4006.31,4207.17 3994.2,4207.17 3994.2,4117.17 4006.31,4117.17
  region: 4038.56,4322.17 3995,4322.17 3995,4229.14 4038.56,4229.14
  region: 5780,3690 5670,3690 5670,3635 5780,3635
  region: 4230,4322.17 4038.56,4322.17 4038.56,4292.17 4230,4292.17
  region: 5705,3570 5625,3570 5625,3470 5705,3470
  region: 5670,4510 5560,4510 5560,4375 5670,4375
  region: 5495,3575 5405,3575 5405,3465 5495,3465
  region: 5455,4927.17 5270.08,4927.17 5270.08,4780 5455,4780
  region: 5175,4735 5035,4735 5035,4625 5175,4625
  region: 5000,4800 4920,4800 4920,4620 5000,4620
  region: 4885,3900 4785,3900 4785,3710 4885,3710
  region: 4097.84,4117.17 3994.2,4117.17 3994.2,4027.17 4097.84,4027.17
  region: 4230,4560 3995,4560 3995,4322.17 4230,4322.17
  region: 6305,4015 6215,4015 6215,3900 6305,3900
  region: 5478.46,3420 5234.92,3420 5234.92,3312.74 5478.46,3312.74
  region: 4890,4735 4800,4735 4800,4125 4890,4125
  region: 4230,3934.14 3994.2,3934.14 3994.2,3420 4230,3420
  region: 5605,3570 5525,3570 5525,3465 5605,3465
  region: 6085,3615 5765,3615 5765,3410 6085,3410
  region: 6215,3950 6010,3950 6010,3900 6215,3900
  region: 6515,3945 6365,3945 6365,3860 6515,3860
  region: 5890,3910 5710,3910 5710,3750 5890,3750
  region: 6365,4655 5400,4655 5400,4620 6365,4620
  region: 6510,4930 5400,4930 5400,4655 6510,4655
  region: 4700.79,4930 4540,4930 4540,4834.14 4700.79,4834.14
  region: 5880,3760 5760,3760 5760,3615 5880,3615
  region: 6515,3615 6085,3615 6085,3270 6515,3270
  region: 6510,4655 6365,4655 6365,4170 6510,4170
  region: 6370,4625 6040,4625 6040,4205 6370,4205
  region: 6040,4625 5720,4625 5720,4430 6040,4430
  region: 5320,3665 4590,3665 4590,3420 5320,3420
  region: 5030,3990 4795,3990 4795,3925 5030,3925
  region: 4750,4560 4230,4560 4230,4230 4750,4230
  region: 6515,3860 5880,3860 5880,3615 6515,3615
  region: 5320,3855 4955,3855 4955,3595 5320,3595
  region: 4590,3895 4230,3895 4230,3420 4590,3420
  region: 5430,4945 4680,4945 4680,4915 5430,4915
  region: 6510,4955 4000,4955 4000,4930 6510,4930
  region: 6085,3317.5 3994.2,3317.5 3994.2,3270 6085,3270
  region: 5455,4834.14 4540,4834.14 4540,4780 5455,4780
  region: 4415,3420 3994.2,3420 3994.2,3317.5 4415,3317.5
  region: 4540,4930 3995,4930 3995,4560 4540,4560
  region: 4520,2725 3975,2725 3975,2355 4520,2355
  region: 4395,1215 3974.2,1215 3974.2,1112.5 4395,1112.5
  region: 5435,2629.14 4520,2629.14 4520,2575 5435,2575
  region: 6065,1112.5 3974.2,1112.5 3974.2,1065 6065,1065
  region: 6490,2750 3980,2750 3980,2725 6490,2725
  region: 5410,2740 4660,2740 4660,2710 5410,2710
  region: 4570,1690 4210,1690 4210,1215 4570,1215
  region: 5300,1650 4935,1650 4935,1390 5300,1390
  region: 6495,1655 5860,1655 5860,1410 6495,1410
  region: 4730,2355 4210,2355 4210,2025 4730,2025
  region: 5010,1785 4775,1785 4775,1720 5010,1720
  region: 5300,1460 4570,1460 4570,1215 5300,1215
  region: 6020,2420 5700,2420 5700,2225 6020,2225
  region: 6350,2420 6020,2420 6020,2000 6350,2000
  region: 6490,2450 6345,2450 6345,1965 6490,1965
  region: 6495,1410 6065,1410 6065,1065 6495,1065
  region: 5860,1555 5740,1555 5740,1410 5860,1410
  region: 4680.79,2725 4520,2725 4520,2629.14 4680.79,2629.14
  region: 6490,2725 5380,2725 5380,2450 6490,2450
  region: 6345,2450 5380,2450 5380,2415 6345,2415
  region: 5870,1705 5690,1705 5690,1545 5870,1545
  region: 6495,1740 6345,1740 6345,1655 6495,1655
  region: 6195,1745 5990,1745 5990,1695 6195,1695
  region: 6065,1410 5745,1410 5745,1205 6065,1205
  region: 5585,1365 5505,1365 5505,1260 5585,1260
  region: 4210,1729.14 3974.2,1729.14 3974.2,1215 4210,1215
  region: 4870,2530 4780,2530 4780,1920 4870,1920
  region: 5458.46,1215 5214.92,1215 5214.92,1107.74 5458.46,1107.74
  region: 6285,1810 6195,1810 6195,1695 6285,1695
  region: 4210,2355 3975,2355 3975,2117.17 4210,2117.17
  region: 4077.84,1912.17 3974.2,1912.17 3974.2,1822.17 4077.84,1822.17
  region: 4865,1695 4765,1695 4765,1505 4865,1505
  region: 4980,2595 4900,2595 4900,2415 4980,2415
  region: 5155,2530 5015,2530 5015,2420 5155,2420
  region: 5435,2722.17 5250.08,2722.17 5250.08,2575 5435,2575
  region: 5475,1370 5385,1370 5385,1260 5475,1260
  region: 5650,2305 5540,2305 5540,2170 5650,2170
  region: 5685,1365 5605,1365 5605,1265 5685,1265
  region: 4210,2117.17 4018.56,2117.17 4018.56,2087.17 4210,2087.17
  region: 5760,1485 5650,1485 5650,1430 5760,1430
  region: 4018.56,2117.17 3975,2117.17 3975,2024.14 4018.56,2024.14
  region: 3986.31,2002.17 3974.2,2002.17 3974.2,1912.17 3986.31,1912.17
  region: 4018.56,2024.14 3975,2024.14 3975,1994.14 4018.56,1994.14
  rectangle: 2910,2190 3065,2520
  rectangle: 1680,2385 2765,2545
  rectangle: 1680,1280 1825,2385
  rectangle: 2915,1260 3065,2190
  rectangle: 2295,1260 2915,1370
  rectangle: 1825,1280 2175,1370
  text "VCC  GND  VEE" at 5250,4855 h80
  text "VCC  GND  VEE" at 11165,4855 h80
  text "GND" at 4210,4220 h80
  text "GND" at 10125,4220 h80
  text "SCLK" at 4210,4135 h80
  text "SCLK" at 10125,4135 h80
  text "CS" at 4210,4045 h80
  text "CS" at 10125,4045 h80
  text "DOUT" at 4210,3955 h80
  text "DOUT" at 10125,3955 h80
  text "2014年TI杯电子设计大赛" at 5215,3345 h80
  text "2014年TI杯电子设计大赛" at 11130,3345 h80
  text "AD637有效值检测" at 6070,3340 h80
  text "AD637有效值检测" at 11985,3340 h80
  text "VCC  GND  VEE" at 5230,2650 h80
  text "VCC  GND  VEE" at 11145,2650 h80
  text "GND" at 4190,2015 h80
  text "GND" at 10105,2015 h80
  text "SCLK" at 4190,1930 h80
  text "SCLK" at 10105,1930 h80
  text "CS" at 4190,1840 h80
  text "CS" at 10105,1840 h80
  text "DOUT" at 4190,1750 h80
  text "DOUT" at 10105,1750 h80
  text "2014年TI杯电子设计大赛" at 5195,1140 h80
  text "2014年TI杯电子设计大赛" at 11110,1140 h80
  text "AD637有效值检测" at 6050,1135 h80
  text "AD637有效值检测" at 11965,1135 h80